# EAGLE board timer (EAGLE 5.07)
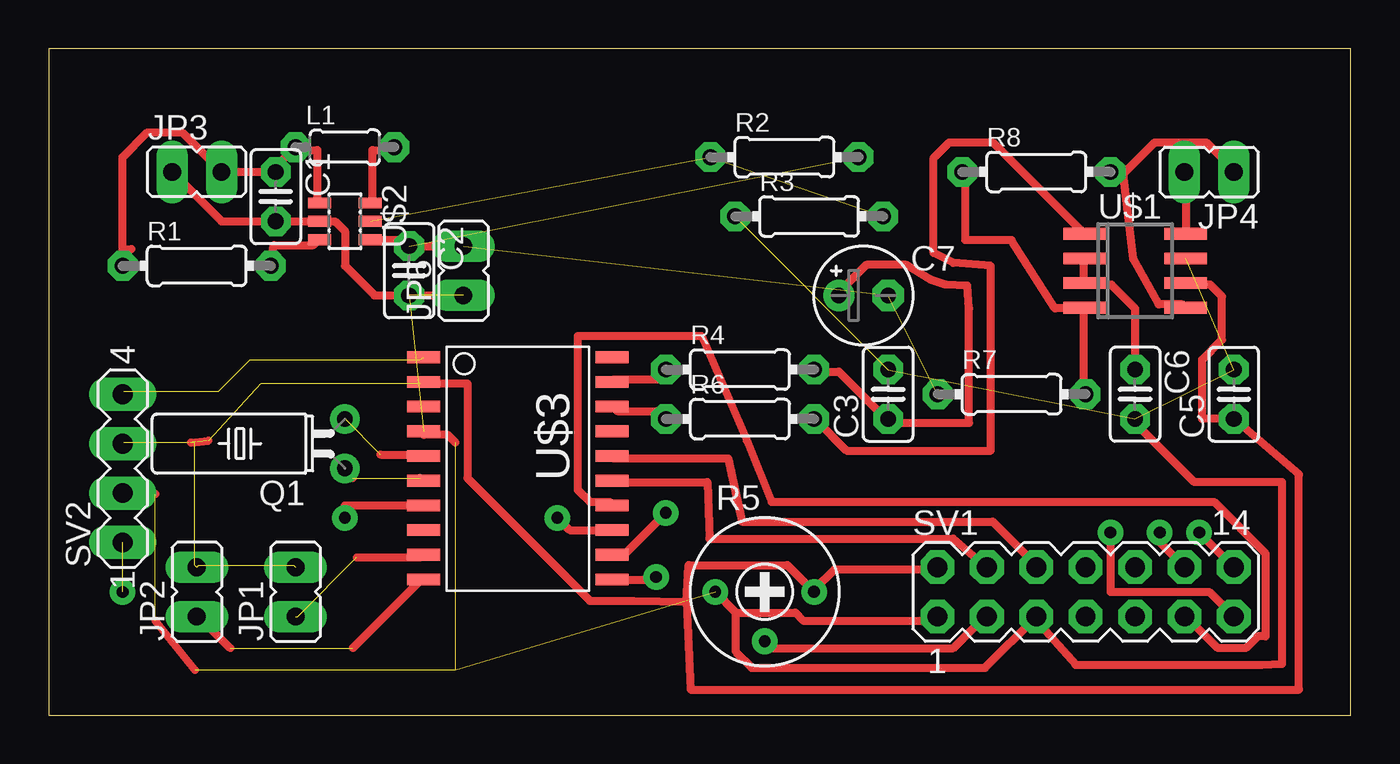
[diagram p0: board, top side]
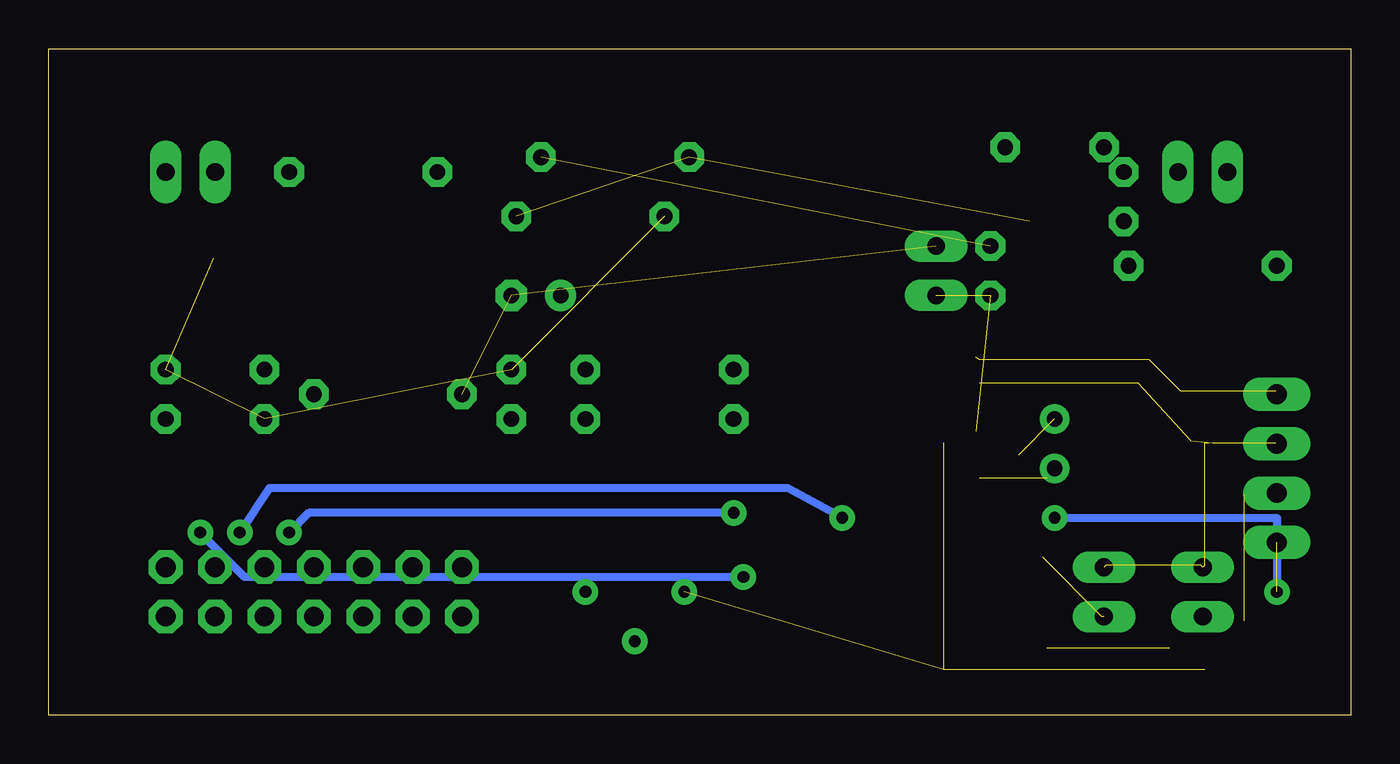
[diagram p1: board, bottom side, seen from below]

Size 66.98 x 34.28 mm. Coordinates in mm from the lower left corner, seen from the top.
Outline: 0,0 66.98,0 66.98,34.28 0,34.28 0,0
Copper layers (1*16): Top 0.035mm / dielectric 1.5mm / Bottom 0.035mm
Design rules "martin": minimum track width 16mil, minimum drill 16mil, track to track 8mil, track to pad 20mil, pad to pad 8mil, via to via 8mil, smd to smd 8mil, copper to edge 8mil, drill to drill 8mil, minimum pad ring 14mil, minimum via ring 14mil, stop-mask expansion 4mil, vias tented up to drill 0mil, thermal gap 10mil

## Footprints (pad centres in the part's own frame; a part is rotated, then mirrored left to right if it is on the bottom)
C025-025X050 = drill 0.813 octagon: 1 -1.27,0; 2 1.27,0
E2,5-5 = drill 0.813 pad 1.6 round: + -1.27,0 | drill 0.813 pad 1.6 octagon: - 1.27,0
JP1 = drill 0.914 long: 1 0,-1.27; 2 0,1.27
0204/5 = drill 0.813 octagon: 1 -2.54,0; 2 2.54,0
TC38H = drill 0.813 round: 1 -1.27,0; 2 1.27,0
0204/7 = drill 0.813 octagon: 1 -3.81,0; 2 3.81,0
RTRIM3339P = drill 0.61 round: 1 -2.54,0; 2 0,-2.54; 3 2.54,0
MA07-2 = drill 1.016 octagon: 1 -7.62,-1.27; 2 -7.62,1.27; 3 -5.08,-1.27; 4 -5.08,1.27; 5 -2.54,-1.27; 6 -2.54,1.27; 7 0,-1.27; 8 0,1.27; 9 2.54,-1.27; 10 2.54,1.27; 11 5.08,-1.27; 12 5.08,1.27; 13 7.62,-1.27; 14 7.62,1.27
MA04-1 = drill 1.016 long: 1 -3.81,0; 2 -1.27,0; 3 1.27,0; 4 3.81,0
SO08 = smd 0.6 x 2.2: 1 -1.905,-2.6; 2 -0.635,-2.6; 3 0.635,-2.6; 4 1.905,-2.6; 5 1.905,2.6; 6 0.635,2.6; 7 -0.635,2.6; 8 -1.905,2.6
SOT33DBV = smd 0.55 x 1.2: 1 -0.95,-1.3; 2 0,-1.3; 3 0.95,-1.3; 4 0.95,1.3; 5 0,1.3; 6 -0.95,1.3
DW20 = smd 0.6 x 1.7: 1 -5.715,-4.85; 2 -4.445,-4.85; 3 -3.175,-4.85; 4 -1.905,-4.85; 5 -0.635,-4.85; 6 0.635,-4.85; 7 1.905,-4.85; 8 3.175,-4.85; 9 4.445,-4.85; 10 5.715,-4.85; 11 5.715,4.85; 12 4.445,4.85; 13 3.175,4.85; 14 1.905,4.85; 15 0.635,4.85; 16 -0.635,4.85; 17 -1.905,4.85; 18 -3.175,4.85; 19 -4.445,4.85; 20 -5.715,4.85

## Placement (x,y rotation side)
C1  10u  [C025-025X050]  11.68,26.67 270 top
C2  10u  [C025-025X050]  18.54,22.86 270 top
C3  0.01u  [C025-025X050]  43.18,16.51 90 top
C5  1u  [C025-025X050]  60.96,16.51 90 top
C6  1u  [C025-025X050]  55.88,16.51 270 top
C7  47u  [E2,5-5]  41.91,21.59 0 top
JP1  [JP1]  12.7,6.35 0 top
JP2  [JP1]  7.62,6.35 0 top
JP3  [JP1]  7.62,27.94 270 top
JP4  [JP1]  59.69,27.94 90 top
JP5  [JP1]  21.34,22.86 0 top
L1  10u  [0204/5]  15.24,29.21 0 top
Q1  [TC38H]  15.24,13.97 90 top
R1  165k  [0204/7]  7.62,23.11 0 top
R2  250k  [0204/7]  37.85,28.7 0 top
R3  150k  [0204/7]  39.12,25.65 0 top
R4  2k  [0204/7]  35.56,17.78 0 top
R5  [RTRIM3339P]  36.83,6.35 0 top
R6  20k  [0204/7]  35.56,15.24 0 top
R7  20k  [0204/7]  49.53,16.51 0 top
R8  20k  [0204/7]  50.8,27.94 0 top
SV1  [MA07-2]  53.34,6.35 0 top
SV2  [MA04-1]  3.81,12.7 90 top
U$1  LM4819  [SO08]  55.88,22.86 270 top
U$2  TPS61097_SOT33DBV  [SOT33DBV]  15.24,25.4 270 top
U$3  F21X1---DW20  [DW20]  24.13,12.7 270 top

## Library data of the parts
C1-C3 C5 C6 L1 R1-R8 = resistor
C7 = rcl
JP1-JP5 = jumper
Q1 = crystal
SV1 SV2 = con-lstb
U$1 U$2 = mbonnin
U$3 = TI_MSP430_v15

## Nets
DB4: SV1.11 U$3.14
DB5: SV1.12 U$3.13
DB6: SV1.13 U$3.12
DB7: SV1.14 U$3.11
E: SV1.6 U$3.16
GND: C1.2 C2.2 C3.2 C5.2 C6.2 JP3.1 JP5.1 R3.1 R5.1 SV1.1 SV1.5 SV2.2 U$1.7 U$2.2 U$3.4
N$1: C1.1 JP3.2 L1.1 R1.1 U$2.1
N$2: R1.2 U$2.3
N$3: L1.2 U$2.6
N$4: SV2.4 U$3.1
N$5: R2.1 R3.2 U$2.5
N$6: C3.1 C7.+ R4.2
N$8: R4.1 U$3.19
N$9: Q1.2 U$3.5
N$10: Q1.1 U$3.6
N$11: C7.- JP5.2 R7.1
N$12: JP1.1 U$3.9
N$13: JP2.1 U$3.10
N$14: R6.1 U$3.18
N$15: R6.2 U$1.1
N$16: R5.2 SV1.3
N$17: C6.1 U$1.2 U$1.3
N$18: R7.2 R8.1 U$1.4
N$19: JP4.1 R8.2 U$1.5
N$20: JP4.2 U$1.8
N$21: SV2.1 U$3.7
OUT: C2.1 R2.2 U$2.4
RS: SV1.4 U$3.15
VCC: C5.1 JP1.2 JP2.2 R5.3 SV1.2 SV2.3 U$1.6 U$3.2

## Tracks (layer width: path | path; a pad name or v marks a point on that pad's centre or on a via)
DB4
  Top 0.406: U$3.14 28.85,10.97 27.84,10.97 27.23,11.58 27.23,19.51 33.58,19.51 35.92,14.12 37.19,10.97 59.94,10.97 62.59,8.33 62.59,4.06 62.18,4.06 61.57,3.45 60.15,3.45 58.52,5.08 SV1.11
DB5  (via drill 0.6)
  Top 0.406: U$3.13 26.8,9.53 v26.16,10.16 | v57.15,9.4 57.15,8.89 SV1.12
  Bottom 0.406: v26.16,10.16 28.96,11.68 29.21,11.68 55.63,11.68 v57.15,9.4
DB6  (via drill 0.6)
  Top 0.406: U$3.12 29.59,8.26 v31.75,10.41 | v54.61,9.4 54.61,6.35 59.69,6.35 SV1.13
  Bottom 0.406: v31.75,10.41 53.59,10.41 v54.61,9.4
DB7  (via drill 0.6)
  Top 0.406: U$3.11 31.11,6.99 v31.24,7.11 | v59.18,9.4 SV1.14
  Bottom 0.406: v31.24,7.11 56.9,7.11 v59.18,9.4
E
  Top 0.406: U$3.16 29.06,13.21 34.95,13.21 35.66,9.96 48.56,9.96 50.8,7.72 SV1.6
GND  (10 unrouted)
  Top 0.406: 20.93,14.02 20.52,14.43 19.3,14.43 U$3.4 | 7.52,2.34 5.49,4.88 | 5.49,11.38 3.86,11.38 SV2.2 | 35.36,5.28 38.41,5.28 38.81,4.88 45.52,4.88 SV1.1 | 35.36,5.28 R5.1 | 35.36,5.28 35.36,3.25 36.17,2.44 48.16,2.44 SV1.5 50.8,4.88 52.83,2.59 62.38,2.59 63.45,2.64 63.45,11.99 58.93,11.99 55.88,15.04 C6.2 | JP3.1 8.89,25.4 C1.2 U$2.2 14.73,25.4 15.24,24.89 15.24,23.11 16.76,21.59 C2.2 JP5.1
N$1
  Top 0.406: U$2.1 13.82,26.42 13.82,29.06 12.8,29.06 L1.1 11.68,28.19 C1.1 JP3.2 6.86,29.97 5.08,29.97 3.81,28.7 3.81,23.98 3.86,23.98 | 3.86,23.98 4.27,23.98 | R1.1 3.86,23.98
N$2
  Top 0.406: U$2.3 13.82,24.38 13.61,24.18 11.58,24.18 R1.2
N$3
  Top 0.406: U$2.6 16.66,26.42 16.66,29.06 17.68,29.06 L1.2
N$4  (4 unrouted)
  Top 0.406: SV2.4 3.86,16.66
N$5  (2 unrouted)
N$6
  Top 0.406: R4.2 39.42,17.68 40.64,17.68 43.08,15.24 C3.1 43.28,15.24 43.48,15.04 47.35,15.04 47.35,20.93 47.24,22.1 46.13,22.15 45.36,22.4 44.09,23.16 42.06,23.16 40.64,21.74 C7.+
N$8
  Top 0.406: U$3.19 29.06,17.27 31.29,17.27 31.7,17.68 R4.1
N$9  (1 unrouted)
  Top 0.406: 17.07,13.41 19.1,13.41 U$3.5
N$10  (1 unrouted)
  Top 0.406: 15.65,12.19 15.24,12.6 Q1.1 | 19.1,12.19 U$3.6
N$11  (2 unrouted)
  Top 0.406: 18.8,24.13 JP5.2 21.34,23.88
N$12  (2 unrouted)
  Top 0.406: 15.85,8.13 19.1,8.13 U$3.9
N$13  (1 unrouted)
  Top 0.406: 15.65,3.45 19.1,6.91 U$3.10 | 9.35,3.45 7.72,5.08 JP2.1
N$14
  Top 0.406: U$3.18 29.06,15.85 29.26,15.65 31.29,15.65 31.7,15.24 R6.1
N$15
  Top 0.406: U$1.1 53.24,24.79 48.56,29.46 46.33,29.46 45.52,28.65 45.52,23.77 46.53,23.27 48.46,23.11 48.46,13.61 41.05,13.61 39.42,15.24 R6.2
N$16
  Top 0.406: R5.2 37.19,3.45 46.53,3.45 48.16,5.08 SV1.3
N$17
  Top 0.406: U$1.2 53.24,23.37 53.24,22.35 U$1.3 53.44,22.15 54.66,22.15 55.88,20.93 C6.1
N$18
  Top 0.406: R7.2 53.24,16.66 53.24,20.93 U$1.4 53.03,20.93 51.77,20.93 49.53,24.43 47.14,24.43 47.14,27.84 R8.1
N$19
  Top 0.406: 55.27,27.84 55.78,23.47 57.1,21.13 58.32,21.13 U$1.5 | 55.27,27.84 54.66,27.84 R8.2 55.27,27.84 | 55.27,27.84 56.9,29.46 59.54,29.46 60.96,28.04 JP4.1
N$20
  Top 0.406: U$1.8 58.52,24.79 58.52,27.84 JP4.2
N$21  (via drill 0.6)  (1 unrouted)
  Top 0.406: U$3.7 15.24,10.79 v15.24,10.16
  Bottom 0.406: v15.24,10.16 3.81,10.16 v3.81,6.35
OUT  (1 unrouted)
  Top 0.406: U$2.4 18.22,24.45 C2.1
RS
  Top 0.406: U$3.15 29.06,11.99 33.88,11.99 33.98,9.09 46.53,9.09 SV1.4
VCC  (10 unrouted)
  Top 0.406: U$1.6 58.52,22.15 59.74,22.15 60.35,21.54 60.35,19.3 59.33,18.29 59.33,15.24 C5.1 64.31,12.39 64.31,1.32 33.02,1.32 32.82,5.84 | SV1.2 45.72,7.52 40.44,7.52 39.42,6.5 R5.3 38,7.72 32.92,7.72 32.82,5.84 | 19.1,17.07 U$3.2 19.3,17.07 21.54,17.07 21.54,12.19 27.84,5.89 30.07,5.89 32.82,5.84 | 3.86,14.02 SV2.3 | 7.32,14.02 8.23,14.12